# EAGLE board RAM (EAGLE 9.6.2)
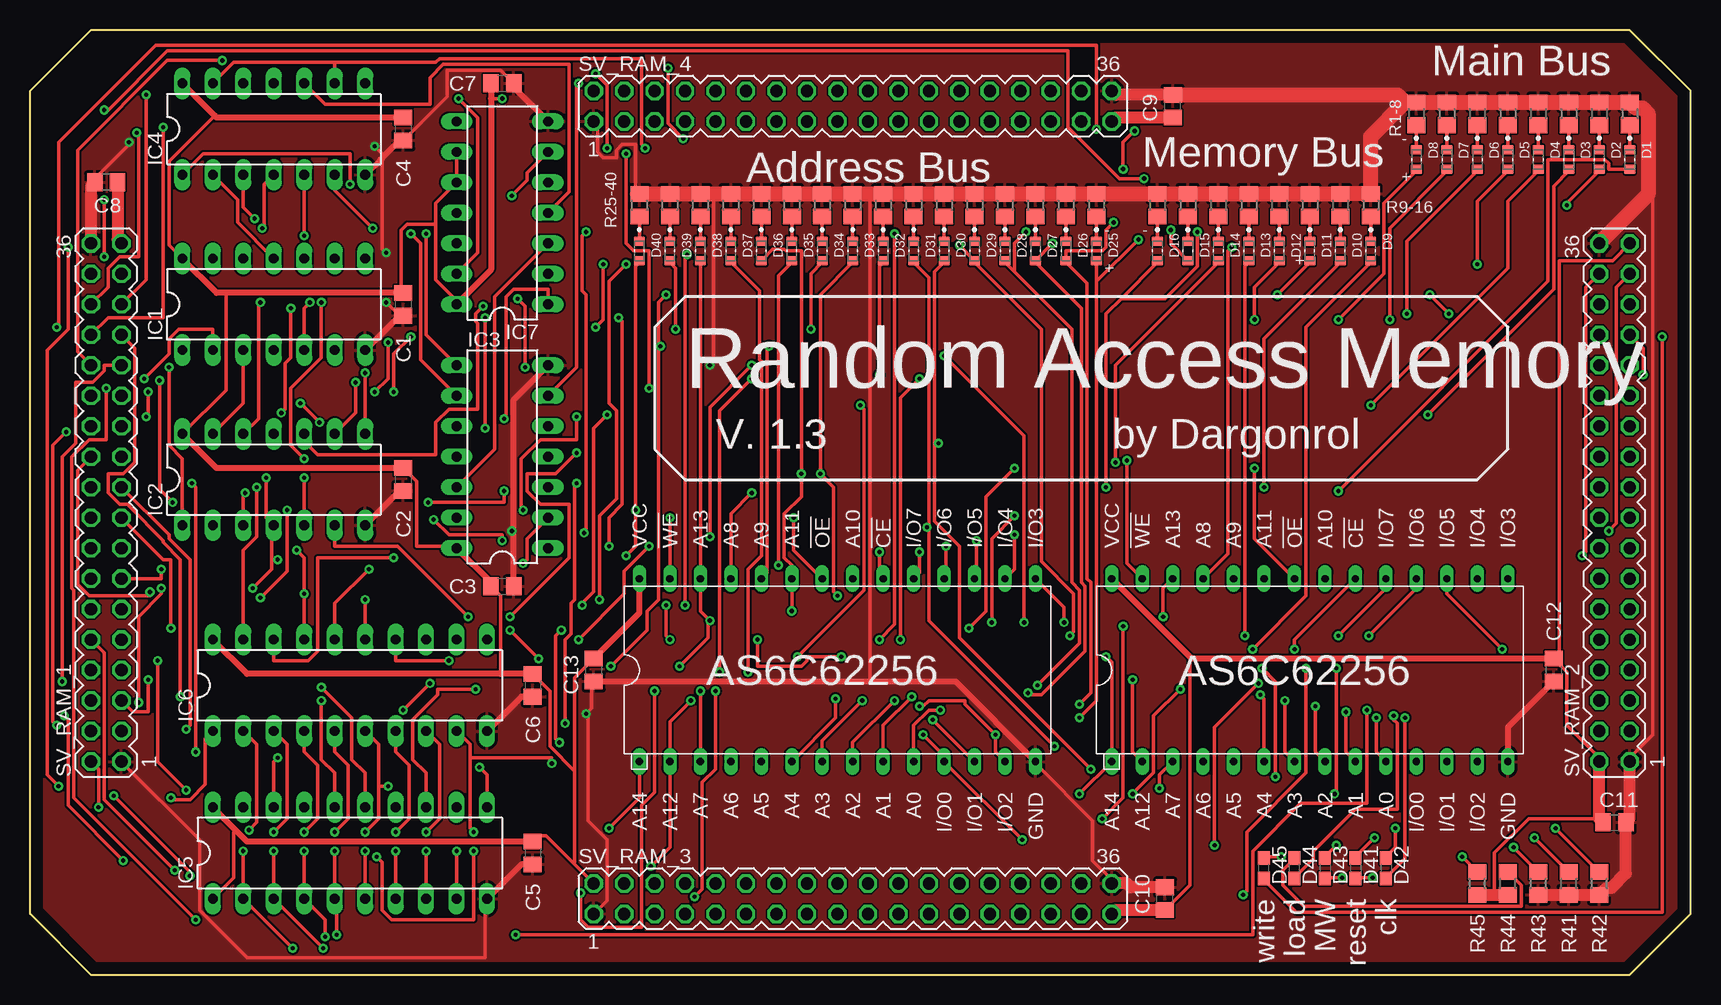
[diagram p0: board, top side]
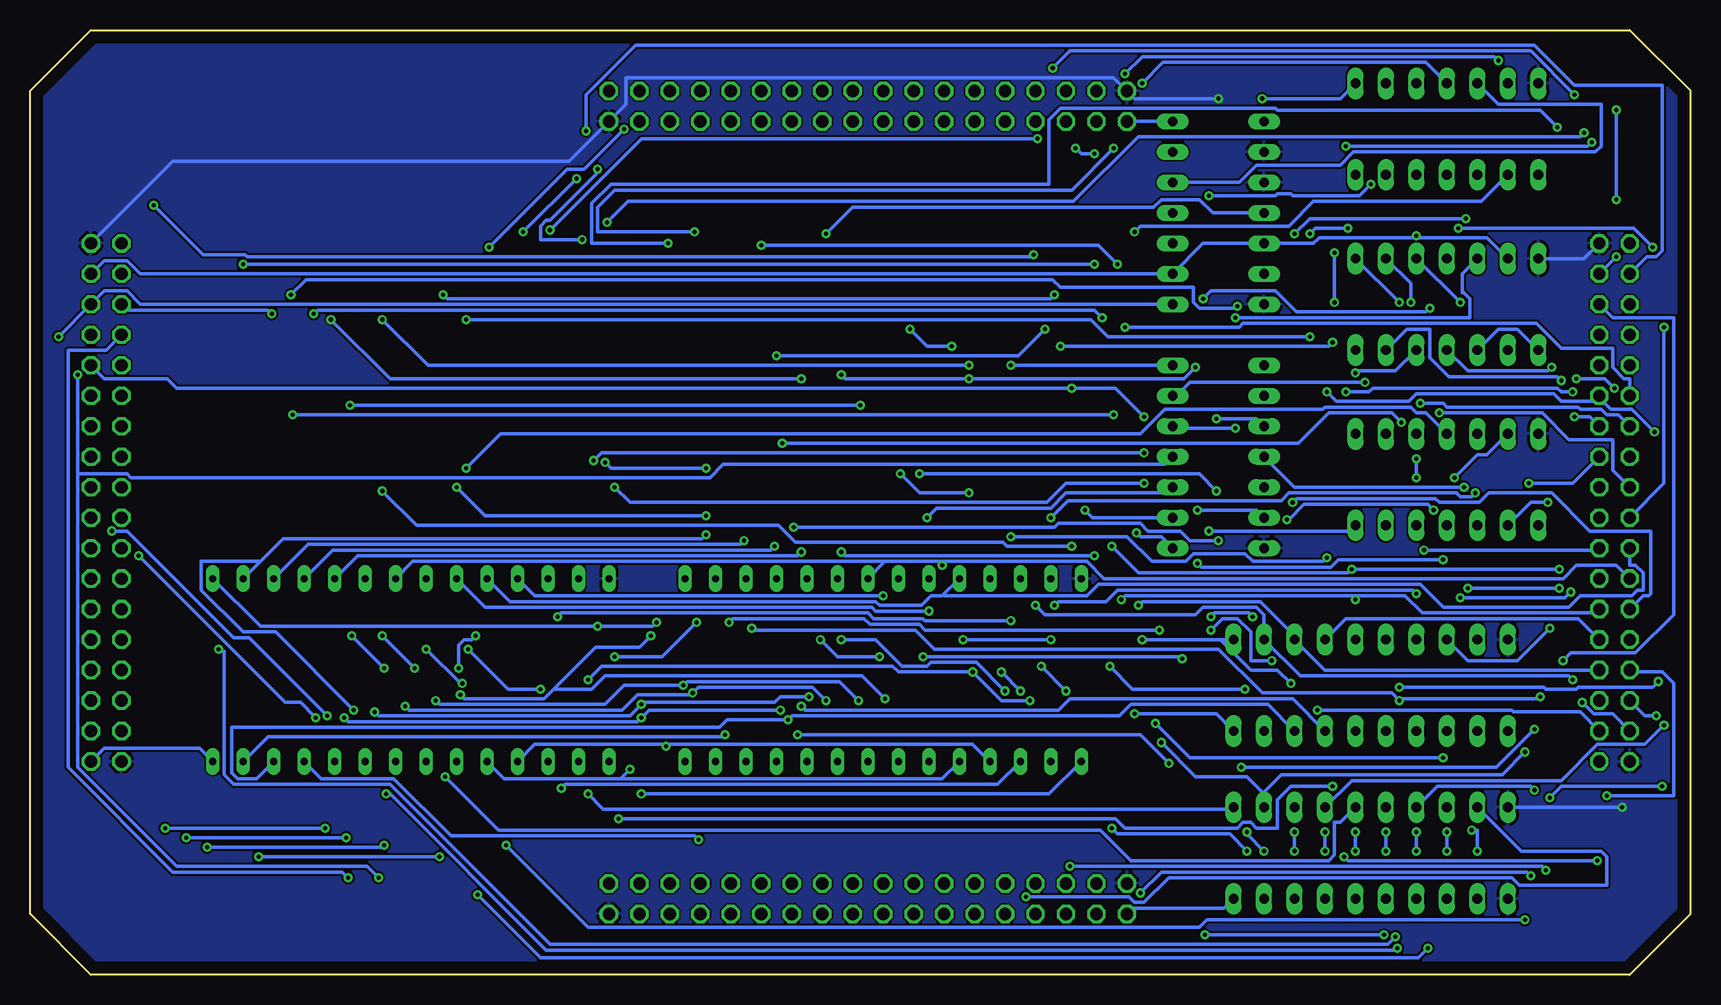
[diagram p1: board, bottom side, seen from below]

Size 138.43 x 78.74 mm. Coordinates in mm from the lower left corner, seen from the top.
Outline: 133.35,0 138.43,5.08 138.43,73.66 133.35,78.74 5.08,78.74 0,73.66 0,5.08 5.08,0 133.35,0
Copper layers (1*16): Top 0.035mm / dielectric 1.5mm / Bottom 0.035mm
Design rules "default *": minimum track width 12mil, minimum drill 0.35mm, track to track 6mil, track to pad 6mil, pad to pad 6mil, via to via 6mil, smd to smd 6mil, copper to edge 40mil, drill to drill 6mil, minimum pad ring 10mil, minimum via ring 8mil, stop-mask expansion 4mil, vias tented up to drill 0mil, thermal gap 10mil

## Footprints (pad centres in the part's own frame; a part is rotated, then mirrored left to right if it is on the bottom)
C0805 = smd 1.3 x 1.5: 1 -0.95,0; 2 0.95,0
LEDC1608X45N = smd 0.81 x 0.93: A 0.81,0; C -0.81,0
0603 = smd 1.1 x 1: 1 -0.85,0; 2 0.85,0
DIL14 = drill 0.813 long: 1 -7.62,-3.81; 2 -5.08,-3.81; 3 -2.54,-3.81; 4 0,-3.81; 5 2.54,-3.81; 6 5.08,-3.81; 7 7.62,-3.81; 8 7.62,3.81; 9 5.08,3.81; 10 2.54,3.81; 11 0,3.81; 12 -2.54,3.81; 13 -5.08,3.81; 14 -7.62,3.81
DIL20 = drill 0.813 long: 1 -11.43,-3.81; 2 -8.89,-3.81; 3 -6.35,-3.81; 4 -3.81,-3.81; 5 -1.27,-3.81; 6 1.27,-3.81; 7 3.81,-3.81; 8 6.35,-3.81; 9 8.89,-3.81; 10 11.43,-3.81; 11 11.43,3.81; 12 8.89,3.81; 13 6.35,3.81; 14 3.81,3.81; 15 1.27,3.81; 16 -1.27,3.81; 17 -3.81,3.81; 18 -6.35,3.81; 19 -8.89,3.81; 20 -11.43,3.81
R0805 = smd 1.3 x 1.5: 1 -0.95,0; 2 0.95,0
MA18-2 = drill 1.016 octagon: 1 -21.59,-1.27; 2 -21.59,1.27; 3 -19.05,-1.27; 4 -19.05,1.27; 5 -16.51,-1.27; 6 -16.51,1.27; 7 -13.97,-1.27; 8 -13.97,1.27; 9 -11.43,-1.27; 10 -11.43,1.27; 11 -8.89,-1.27; 12 -8.89,1.27; 13 -6.35,-1.27; 14 -6.35,1.27; 15 -3.81,-1.27; 16 -3.81,1.27; 17 -1.27,-1.27; 18 -1.27,1.27; 19 1.27,-1.27; 20 1.27,1.27; 21 3.81,-1.27; 22 3.81,1.27; 23 6.35,-1.27; 24 6.35,1.27; 25 8.89,-1.27; 26 8.89,1.27; 27 11.43,-1.27; 28 11.43,1.27; 29 13.97,-1.27; 30 13.97,1.27; 31 16.51,-1.27; 32 16.51,1.27; 33 19.05,-1.27; 34 19.05,1.27; 35 21.59,-1.27; 36 21.59,1.27
AS6C62256 = drill 0.6 long: !CE 7.62,-3.81; !OE 7.62,1.27; !WE 7.62,13.97; A0 -7.62,-6.35; A1 -7.62,-3.81; A2 -7.62,-1.27; A3 -7.62,1.27; A4 -7.62,3.81; A5 -7.62,6.35; A6 -7.62,8.89; A7 -7.62,11.43; A8 7.62,8.89; A9 7.62,6.35; A10 7.62,-1.27; A11 7.62,3.81; A12 -7.62,13.97; A13 7.62,11.43; A14 -7.62,16.51; GND -7.62,-16.51; I/O0 -7.62,-8.89; I/O1 -7.62,-11.43; I/O2 -7.62,-13.97; I/O3 7.62,-16.51; I/O4 7.62,-13.97; I/O5 7.62,-11.43; I/O6 7.62,-8.89; I/O7 7.62,-6.35; VCC 7.62,16.51

## Placement (x,y rotation side)
C1  [C0805]  31.11,55.88 270 top
C2  [C0805]  31.11,41.27 270 top
C3  [C0805]  39.37,32.38 0 top
C4  [C0805]  31.11,70.48 270 top
C5  [C0805]  41.91,10.16 270 top
C6  [C0805]  41.91,24.13 270 top
C7  [C0805]  39.37,74.3 0 top
C8  [C0805]  6.35,66.04 180 top
C9  [C0805]  95.25,72.39 90 top
C10  [C0805]  94.61,6.35 90 top
C11  [C0805]  132.08,12.7 0 top
C12  [C0805]  127,25.4 270 top
C13  [C0805]  46.99,25.4 270 top
D1  LTST-C193KRKT-5A  [LEDC1608X45N]  133.35,67.94 270 top
D2  LTST-C193KRKT-5A  [LEDC1608X45N]  130.81,67.94 270 top
D3  LTST-C193KRKT-5A  [LEDC1608X45N]  128.27,67.94 270 top
D4  LTST-C193KRKT-5A  [LEDC1608X45N]  125.73,67.94 270 top
D5  LTST-C193KRKT-5A  [LEDC1608X45N]  123.19,67.94 270 top
D6  LTST-C193KRKT-5A  [LEDC1608X45N]  120.65,67.94 270 top
D7  LTST-C193KRKT-5A  [LEDC1608X45N]  118.11,67.94 270 top
D8  LTST-C193KRKT-5A  [LEDC1608X45N]  115.57,67.94 270 top
D9  LTST-C193KRKT-5A  [LEDC1608X45N]  111.76,60.33 270 top
D10  LTST-C193KRKT-5A  [LEDC1608X45N]  109.22,60.33 270 top
D11  LTST-C193KRKT-5A  [LEDC1608X45N]  106.68,60.33 270 top
D12  LTST-C193KRKT-5A  [LEDC1608X45N]  104.14,60.33 270 top
D13  LTST-C193KRKT-5A  [LEDC1608X45N]  101.6,60.33 270 top
D14  LTST-C193KRKT-5A  [LEDC1608X45N]  99.06,60.33 270 top
D15  LTST-C193KRKT-5A  [LEDC1608X45N]  96.52,60.33 270 top
D16  LTST-C193KRKT-5A  [LEDC1608X45N]  93.98,60.33 270 top
D25  LTST-C193KRKT-5A  [LEDC1608X45N]  88.9,60.33 270 top
D26  LTST-C193KRKT-5A  [LEDC1608X45N]  86.36,60.33 270 top
D27  LTST-C193KRKT-5A  [LEDC1608X45N]  83.82,60.33 270 top
D28  LTST-C193KRKT-5A  [LEDC1608X45N]  81.28,60.33 270 top
D29  LTST-C193KRKT-5A  [LEDC1608X45N]  78.74,60.33 270 top
D30  LTST-C193KRKT-5A  [LEDC1608X45N]  76.2,60.33 270 top
D31  LTST-C193KRKT-5A  [LEDC1608X45N]  73.66,60.33 270 top
D32  LTST-C193KRKT-5A  [LEDC1608X45N]  71.12,60.33 270 top
D33  LTST-C193KRKT-5A  [LEDC1608X45N]  68.58,60.33 270 top
D34  LTST-C193KRKT-5A  [LEDC1608X45N]  66.04,60.33 270 top
D35  LTST-C193KRKT-5A  [LEDC1608X45N]  63.5,60.33 270 top
D36  LTST-C193KRKT-5A  [LEDC1608X45N]  60.96,60.33 270 top
D37  LTST-C193KRKT-5A  [LEDC1608X45N]  58.42,60.33 270 top
D38  LTST-C193KRKT-5A  [LEDC1608X45N]  55.88,60.33 270 top
D39  LTST-C193KRKT-5A  [LEDC1608X45N]  53.34,60.33 270 top
D40  LTST-C193KRKT-5A  [LEDC1608X45N]  50.8,60.33 270 top
D41  LTST-C193TBKT-5A  [0603]  110.49,8.89 270 top
D42  LTST-C193TBKT-5A  [0603]  113.03,8.89 270 top
D43  LTST-C193TBKT-5A  [0603]  107.95,8.89 270 top
D44  LTST-C193TBKT-5A  [0603]  105.41,8.89 90 top
D45  LTST-C193TBKT-5A  [0603]  102.87,8.89 90 top
IC1  74HCT04N  [DIL14]  20.32,55.88 0 top
IC2  74HCT00N  [DIL14]  20.32,41.27 0 top
IC3  74HCT32N  [DIL14]  39.37,43.18 90 top
IC4  74HCT04N  [DIL14]  20.32,70.48 0 top
IC5  74HCT245N  [DIL20]  26.67,10.16 0 top
IC6  74HCT245N  [DIL20]  26.67,24.13 0 top
IC7  74HCT08N  [DIL14]  39.37,63.5 90 top
R1  [R0805]  133.35,71.75 270 top
R2  [R0805]  130.81,71.75 270 top
R3  [R0805]  128.27,71.75 270 top
R4  [R0805]  125.73,71.75 270 top
R5  [R0805]  123.19,71.75 270 top
R6  [R0805]  120.65,71.75 270 top
R7  [R0805]  118.11,71.75 270 top
R8  [R0805]  115.57,71.75 270 top
R9  [R0805]  111.76,64.14 270 top
R10  [R0805]  109.22,64.14 270 top
R11  [R0805]  106.68,64.14 270 top
R12  [R0805]  104.14,64.14 270 top
R13  [R0805]  101.6,64.14 270 top
R14  [R0805]  99.06,64.14 270 top
R15  [R0805]  96.52,64.14 270 top
R16  [R0805]  93.98,64.14 270 top
R25  [R0805]  88.9,64.14 270 top
R26  [R0805]  86.36,64.14 270 top
R27  [R0805]  83.82,64.14 270 top
R28  [R0805]  81.28,64.14 270 top
R29  [R0805]  78.74,64.14 270 top
R30  [R0805]  76.2,64.14 270 top
R31  [R0805]  73.66,64.14 270 top
R32  [R0805]  71.12,64.14 270 top
R33  [R0805]  68.58,64.14 270 top
R34  [R0805]  66.04,64.14 270 top
R35  [R0805]  63.5,64.14 270 top
R36  [R0805]  60.96,64.14 270 top
R37  [R0805]  58.42,64.14 270 top
R38  [R0805]  55.88,64.14 270 top
R39  [R0805]  53.34,64.14 270 top
R40  [R0805]  50.8,64.14 270 top
R41  [R0805]  128.27,7.62 90 top
R42  [R0805]  130.81,7.62 90 top
R43  [R0805]  125.73,7.62 90 top
R44  [R0805]  123.19,7.62 90 top
R45  [R0805]  120.65,7.62 90 top
SV_RAM_1  [MA18-2]  6.35,39.37 90 top
SV_RAM_2  [MA18-2]  132.08,39.37 90 top
SV_RAM_3  [MA18-2]  68.58,6.35 0 top
SV_RAM_4  [MA18-2]  68.58,72.39 0 top
U$1  AS6C62256  [AS6C62256]  67.31,25.4 90 top
U$2  AS6C62256  [AS6C62256]  106.68,25.4 90 top

## Library data of the parts
C1-C13 = rcl; SPICEPREFIX: C
D1-D16 D25-D40 = Dargon's_lib; MANUFACTURER: Lite-On; MAXIMUM_PACKAGE_HEIGHT: 0.45 mm; PARTREV: C; STANDARD: IPC 7351B
D41-D45 U$1 U$2 = Dargon's_lib
IC1-IC7 = 74xx-eu
R1-R16 R25-R45 = rcl; SPICEPREFIX: R
SV_RAM_1-SV_RAM_4 = con-lstb; OC_FARNELL: unknown; OC_NEWARK: unknown

## Nets
!CTRL_RAM_ASSERT_MAIN: D45.1 IC3.10 IC7.1 SV_RAM_2.31
!CTRL_RAM_LOAD_MAIN: D44.1 IC1.13 IC4.5 IC7.2 IC7.12 SV_RAM_2.33
BUS_!CLK: IC2.10 SV_RAM_2.32
BUS_!RESET: SV_RAM_2.28
BUS_ADDRESS_BUS_0: D25.A SV_RAM_1.34 U$1.A0 U$2.A0
BUS_ADDRESS_BUS_1: D26.A SV_RAM_1.32 U$1.A1 U$2.A1
BUS_ADDRESS_BUS_2: D27.A SV_RAM_1.30 U$1.A2 U$2.A2
BUS_ADDRESS_BUS_3: D28.A SV_RAM_1.28 U$1.A3 U$2.A3
BUS_ADDRESS_BUS_4: D29.A SV_RAM_1.26 U$1.A4 U$2.A4
BUS_ADDRESS_BUS_5: D30.A SV_RAM_1.24 U$1.A5 U$2.A5
BUS_ADDRESS_BUS_6: D31.A SV_RAM_1.22 U$1.A6 U$2.A6
BUS_ADDRESS_BUS_7: D32.A SV_RAM_1.20 U$1.A7 U$2.A7
BUS_ADDRESS_BUS_8: D33.A SV_RAM_1.18 U$1.A8 U$2.A8
BUS_ADDRESS_BUS_9: D34.A SV_RAM_1.16 U$1.A9 U$2.A9
BUS_ADDRESS_BUS_10: D35.A SV_RAM_1.14 U$1.A10 U$2.A10
BUS_ADDRESS_BUS_11: D36.A SV_RAM_1.12 U$1.A11 U$2.A11
BUS_ADDRESS_BUS_12: D37.A SV_RAM_1.10 U$1.A12 U$2.A12
BUS_ADDRESS_BUS_13: D38.A SV_RAM_1.8 U$1.A13 U$2.A13
BUS_ADDRESS_BUS_14: D39.A SV_RAM_1.6 U$1.A14 U$2.A14
BUS_ADDRESS_BUS_15: D40.A IC1.1 IC1.3 IC2.4 IC2.13 IC3.2 SV_RAM_1.4 U$1.!CE
BUS_CLK: D42.2 SV_RAM_2.34
BUS_MAIN_BUS_0: D1.A IC6.11 SV_RAM_1.3
BUS_MAIN_BUS_1: D2.A IC6.12 SV_RAM_1.5
BUS_MAIN_BUS_2: D3.A IC6.13 SV_RAM_1.7
BUS_MAIN_BUS_3: D4.A IC6.14 SV_RAM_1.9
BUS_MAIN_BUS_4: D5.A IC6.15 SV_RAM_1.11
BUS_MAIN_BUS_5: D6.A IC6.16 SV_RAM_1.13
BUS_MAIN_BUS_6: D7.A IC6.17 SV_RAM_1.15
BUS_MAIN_BUS_7: D8.A IC6.18 SV_RAM_1.17
BUS_MEMORY_BUS_0: D9.A IC5.11 SV_RAM_1.19
BUS_MEMORY_BUS_1: D10.A IC5.12 SV_RAM_1.21
BUS_MEMORY_BUS_2: D11.A IC5.13 SV_RAM_1.23
BUS_MEMORY_BUS_3: D12.A IC5.14 SV_RAM_1.25
BUS_MEMORY_BUS_4: D13.A IC5.15 SV_RAM_1.27
BUS_MEMORY_BUS_5: D14.A IC5.16 SV_RAM_1.29
BUS_MEMORY_BUS_6: D15.A IC5.17 SV_RAM_1.31
BUS_MEMORY_BUS_7: D16.A IC5.18 SV_RAM_1.33
BUS_RESET: D41.2 SV_RAM_2.30
CTRL_MANUAL_WRITE: D43.2 IC3.4 SV_RAM_2.29
CTRL_MANUAL_WRITE_ENABLE: IC3.13 IC4.9 IC4.13 SV_RAM_2.27
GND: C1.2 C2.2 C3.2 C4.2 C5.2 C6.2 C7.2 C8.2 C9.2 C10.2 C11.2 C12.2 C13.2 IC1.7 IC2.7 IC3.7 IC4.7 IC5.10 IC6.10 IC7.7 R1.1 R2.1 R3.1 R4.1 R5.1 R6.1 R7.1 R8.1 R9.1 R10.1 R11.1 R12.1 R13.1 R14.1 R15.1 R16.1 R25.1 R26.1 R27.1 R28.1 R29.1 R30.1 R31.1 R32.1 R33.1 R34.1 R35.1 R36.1 R37.1 R38.1 R39.1 R40.1 R41.1 R42.1 R43.1 SV_RAM_1.1 SV_RAM_1.36 SV_RAM_2.1 SV_RAM_2.36 SV_RAM_3.1 SV_RAM_3.36 SV_RAM_4.1 SV_RAM_4.36 U$1.GND U$2.GND
N$1: IC5.2 IC6.2 U$1.I/O7 U$2.I/O7
N$2: IC5.3 IC6.3 U$1.I/O6 U$2.I/O6
N$3: IC5.4 IC6.4 U$1.I/O5 U$2.I/O5
N$4: IC5.5 IC6.5 U$1.I/O4 U$2.I/O4
N$5: IC5.6 IC6.6 U$1.I/O3 U$2.I/O3
N$6: IC5.7 IC6.7 U$1.I/O2 U$2.I/O2
N$7: IC5.8 IC6.8 U$1.I/O1 U$2.I/O1
N$8: IC5.9 IC6.9 U$1.I/O0 U$2.I/O0
N$9: IC3.8 IC4.3
N$10: IC3.9 IC4.6
N$11: D1.C R1.2
N$12: D2.C R2.2
N$13: IC4.4 IC6.1
N$14: IC3.11 IC6.19
N$15: IC1.10 IC2.12
N$16: IC1.4 IC2.1
N$17: IC1.2 U$2.!CE
N$18: IC1.6 IC2.2
N$20: IC2.3 U$1.!WE
N$21: IC2.6 U$2.!WE
N$22: IC1.8 IC2.5
N$23: D3.C R3.2
N$24: IC1.5 IC1.9 IC2.8
N$25: IC1.11 IC3.1 IC4.2
N$26: IC2.11 U$2.!OE
N$27: D4.C R4.2
N$28: IC3.3 U$1.!OE
N$29: IC1.12 IC3.5
N$30: D5.C R5.2
N$31: D6.C R6.2
N$32: D7.C R7.2
N$33: D8.C R8.2
N$34: D9.C R9.2
N$35: D10.C R10.2
N$36: D11.C R11.2
N$37: D12.C R12.2
N$38: D13.C R13.2
N$39: D14.C R14.2
N$40: D15.C R15.2
N$41: D16.C R16.2
N$42: IC3.12 IC7.3
N$43: IC4.8 IC7.13
N$44: IC2.9 IC3.6 IC4.11
N$45: IC5.19 IC7.11
N$46: IC4.1 IC7.6
N$47: IC4.10 IC7.4
N$48: IC4.12 IC7.5
N$50: D25.C R25.2
N$51: D26.C R26.2
N$52: D27.C R27.2
N$53: D28.C R28.2
N$54: D29.C R29.2
N$55: D30.C R30.2
N$56: D31.C R31.2
N$57: D32.C R32.2
N$58: D33.C R33.2
N$59: D34.C R34.2
N$60: D35.C R35.2
N$61: D36.C R36.2
N$62: D37.C R37.2
N$63: D38.C R38.2
N$64: D39.C R39.2
N$65: D40.C R40.2
N$66: D41.1 R41.2
N$67: D42.1 R42.2
N$68: D43.1 R43.2
N$69: D44.2 R44.2
N$70: D45.2 R45.2
VCC: C1.1 C2.1 C3.1 C4.1 C5.1 C6.1 C7.1 C8.1 C9.1 C10.1 C11.1 C12.1 C13.1 IC1.14 IC2.14 IC3.14 IC4.14 IC5.1 IC5.20 IC6.20 IC7.9 IC7.10 IC7.14 R44.1 R45.1 SV_RAM_1.2 SV_RAM_1.35 SV_RAM_2.2 SV_RAM_2.35 SV_RAM_3.2 SV_RAM_3.35 SV_RAM_4.2 SV_RAM_4.35 U$1.VCC U$2.VCC

## Tracks (layer width: path | path; a pad name or v marks a point on that pad's centre or on a via)
!CTRL_RAM_ASSERT_MAIN  (via drill 0.35)
  Top 0.305: v39.53,46.35 39.69,46.51 39.69,56.52 40.32,57.15 43.18,57.15 IC7.1 | v136.05,53.18 136.05,5.24 105.57,5.24 102.87,7.94 D45.1
  Bottom 0.305: IC3.10 36.2,46.35 v39.53,46.35 | v136.05,53.18 SV_RAM_2.31 132.24,56.99 130.33,56.99 129.22,55.88 IC7.1
!CTRL_RAM_LOAD_MAIN  (via drill 0.35)
  Top 0.305: v22.86,61.59 IC4.5 | v113.67,21.59 113.67,21.27 113.98,20.95 113.98,13.81 110.49,13.81 107,10.32 107,9.68 105.41,8.1 D44.1 | v131.6,36.99 132.24,37.62 132.24,57.31 SV_RAM_2.33
  Bottom 0.305: IC1.13 16.99,61.44 22.86,61.44 | 22.86,61.44 30.96,61.44 31.43,60.96 IC7.12 40.64,60.96 IC7.2 129.22,58.42 130.33,59.53 132.24,59.53 SV_RAM_2.33 | 22.86,61.44 v22.86,61.59 | v113.67,21.59 120.17,28.1 121.44,28.1 130.33,36.99 v131.6,36.99
BUS_!CLK  (via drill 0.35)
  Top 0.305: IC2.10 23.34,44.61 23.34,43.97 23.97,43.34 33.81,43.34 33.81,46.04 34.92,47.15 37.31,47.15 37.31,54.29 37.15,54.45 37.15,55.09 v37.78,55.72 | v118.27,55.09 v116.68,56.67
  Bottom 0.305: v37.78,55.72 37.94,55.56 40.96,55.56 41.43,56.04 41.43,57.31 52.55,57.31 53.18,57.94 115.41,57.94 v116.68,56.67 | v118.27,55.09 118.59,55.4 130.33,55.4 SV_RAM_2.32
BUS_ADDRESS_BUS_0  (via drill 0.35)
  Top 0.305: 88.9,57.78 88.9,22.86 v87.47,21.43 | 88.9,57.78 D25.A | v75.88,22.07 74.93,22.07 73.66,20.8 U$1.A0 | U$2.A0 112.24,18.57 v112.24,21.43 | v92.08,70.33 91.12,69.37 v91.12,67.15 | 88.9,57.78 v92.39,61.28
  Bottom 0.305: v75.88,22.07 86.84,22.07 v87.47,21.43 87.79,21.11 111.92,21.11 v112.24,21.43 | SV_RAM_1.34 3.65,59.85 2.86,59.85 2.38,60.33 2.38,74.14 9.68,74.14 13.02,77.47 87.95,77.47 92.08,73.34 v92.08,70.33 | v91.12,67.15 91.12,66.83 95.09,62.87 95.41,62.87 95.89,62.39 95.89,61.28 v92.39,61.28
BUS_ADDRESS_BUS_1  (via drill 0.35)
  Top 0.305: v87.47,22.54 88.42,23.5 88.42,32.7 88.11,33.02 88.11,57.63 86.36,59.37 D26.A 86.36,60.33 89.38,60.33 89.69,60.64 89.69,62.07 v90.33,62.71 | v73.5,23.18 71.12,20.8 U$1.A1 | U$2.A1 109.7,18.57 v109.7,21.91 | SV_RAM_1.32 6.51,57.31 6.51,58.9 7.46,59.85 9.05,59.85 9.05,70.01 v8.89,70.17
  Bottom 0.305: v73.5,23.18 75.88,23.18 76.36,22.7 87.31,22.7 v87.47,22.54 88.42,21.59 109.38,21.59 v109.7,21.91 | v8.89,70.17 9.21,69.85 46.04,69.85 51.44,64.45 88.58,64.45 v90.33,62.71
BUS_ADDRESS_BUS_2  (via drill 0.35)
  Top 0.305: v83.19,23.5 83.19,23.34 84.3,23.34 87.95,26.99 87.95,32.38 87.63,32.7 87.63,55.56 83.82,59.37 D27.A v85.25,60.96 | v72.07,22.86 68.58,19.37 U$1.A2 | U$2.A2 107.16,18.57 v107.16,22.38 | SV_RAM_1.30 6.51,54.77 11.11,54.77 v11.11,70.64
  Bottom 0.305: v72.07,22.86 73.18,23.97 82.71,23.97 v83.19,23.5 83.34,23.34 87.79,23.34 89.06,22.07 106.84,22.07 v107.16,22.38 | v11.11,70.64 12.54,72.07 34.45,72.07 34.61,72.23 52.55,72.23 53.5,71.28 53.5,65.88 90.01,65.88 91.6,64.29 91.6,60.96 v85.25,60.96
BUS_ADDRESS_BUS_3  (via drill 0.35)
  Top 0.305: 81.99,58.66 86.84,53.82 86.84,32.7 87.47,32.07 87.47,27.62 v83.98,24.13 | 81.99,58.66 81.28,59.37 D28.A | v69.37,22.86 66.04,19.53 U$1.A3 | U$2.A3 104.62,18.57 v104.62,22.86 | SV_RAM_1.28 3.97,51.91 3.97,68.74 11.43,76.2 v16.03,76.2 | v47.15,75.09 48.1,74.14 v48.1,68.9 | v83.03,61.91 82.07,60.96 82.07,58.74 81.99,58.66
  Bottom 0.305: v69.37,22.86 70.96,24.45 83.66,24.45 v83.98,24.13 88.9,24.13 90.49,22.54 104.3,22.54 v104.62,22.86 | v16.03,76.2 16.35,76.52 45.72,76.52 v47.15,75.09 | v48.1,68.9 51.59,65.41 89.69,65.41 91.12,63.98 91.12,61.91 v83.03,61.91
BUS_ADDRESS_BUS_4  (via drill 0.35)
  Top 0.305: v86.68,28.26 87,28.57 87,31.75 84.3,34.45 84.3,53.82 78.74,59.37 D29.A v77.47,60.8 | v102.55,23.34 102.87,23.02 U$2.A4 | U$1.A4 67.15,21.43 v67.15,23.02 | v47.15,53.98 47.78,54.61 v47.78,59.21
  Bottom 0.305: v86.68,28.26 87.63,27.3 91.28,27.3 94.69,23.89 | 94.69,23.89 95.57,23.02 102.23,23.02 v102.55,23.34 | v67.15,23.02 69.06,24.92 90.49,24.92 91.6,23.81 94.61,23.81 94.69,23.89 | SV_RAM_1.26 5.08,49.69 5.56,49.69 6.51,50.64 6.51,52.23 10.79,52.23 12.86,54.29 37.31,54.29 37.62,53.98 v47.15,53.98 | v47.78,59.21 49.37,60.8 v77.47,60.8
BUS_ADDRESS_BUS_5  (via drill 0.35)
  Top 0.305: 75.41,44.29 75.41,37.78 77.47,35.72 77.47,28.1 v88.42,17.14 | 75.41,44.29 75.41,58.58 76.2,59.37 D30.A | v24.13,46.04 v22.54,47.62 | 75.41,44.29 v75.72,44.29
  Bottom 0.305: 89.14,16.43 89.22,16.35 98.9,16.35 U$2.A5 | 89.14,16.43 v88.42,17.14 | U$1.A5 62.39,16.35 89.06,16.35 89.14,16.43 | SV_RAM_1.24 6.03,46.67 6.99,46.67 7.46,47.15 9.21,47.15 9.37,47.31 20.32,47.31 20.64,47.62 v22.54,47.62 | v24.13,46.04 24.92,46.83 30.16,46.83 32.7,44.29 v75.72,44.29
BUS_ADDRESS_BUS_6  (via drill 0.35)
  Top 0.305: 74.93,37.31 74.93,29.53 v85.41,19.05 | 74.93,37.31 74.93,58.1 73.66,59.37 D31.A | SV_RAM_1.22 3.97,42.07 3.97,32.54 4.92,31.59 10,31.59 v10,31.91 | v19.21,31.43 21.43,33.66 v21.43,38.73 | v33.66,37.94 34.92,36.67 39.37,36.67 v39.37,36.2 | 74.93,37.31 v74.77,37.31
  Bottom 0.305: U$2.A6 96.36,19.21 85.57,19.21 v85.41,19.05 85.41,19.21 59.85,19.21 U$1.A6 | v10,31.91 10.48,31.43 v19.21,31.43 | v21.43,38.73 21.91,39.21 32.23,39.21 33.5,37.94 v33.66,37.94 | v39.37,36.2 41.75,36.2 42.55,36.99 45.24,36.99 45.88,37.62 52.7,37.62 53.02,37.31 v74.77,37.31
BUS_ADDRESS_BUS_7  (via drill 0.35)
  Top 0.305: v70.8,50.01 70.8,59.05 71.12,59.37 D32.A | v60.17,49.69 57.47,46.99 v57.47,25.24 | U$1.A7 v55.88,23.65 | U$2.A7 94.14,16.67 v94.14,15.56 | v20.95,46.83 21.27,47.15 21.27,50.96 21.75,51.44 v21.75,55.56 | v40.64,56.36 41.27,55.72 v41.27,50.64
  Bottom 0.305: v70.8,50.01 70.48,49.69 v60.17,49.69 42.23,49.69 v41.27,50.64 | v55.88,23.65 v57.47,25.24 | v94.14,15.56 93.82,15.88 57.78,15.88 U$1.A7 | SV_RAM_1.20 6.51,42.07 6.51,44.61 10.16,44.61 12.38,46.83 v20.95,46.83 | v21.75,55.56 22.07,55.24 32.86,55.24 34.61,56.99 40.01,56.99 v40.64,56.36
BUS_ADDRESS_BUS_8  (via drill 0.35)
  Top 0.305: v60.17,40.16 58.42,38.42 U$1.A8 | D33.A 68.58,59.37 65.88,56.67 v65.88,41.75 66.99,40.64 66.99,31.91 v67.31,31.59 | v2.22,53.98 2.38,54.13 2.38,69.37 10.48,77.47 88.9,77.47 v88.9,70.48 | v100.17,60.64 99.85,60.33 99.85,35.08 U$2.A8
  Bottom 0.305: v65.88,41.75 64.29,40.16 v60.17,40.16 | U$2.A8 96.36,31.59 v67.31,31.59 | SV_RAM_1.18 2.22,40.96 v2.22,53.98 | v88.9,70.48 92.23,67.15 93.66,67.15 v100.17,60.64
BUS_ADDRESS_BUS_9  (via drill 0.35)
  Top 0.305: v65.09,53.82 65.09,58.42 66.04,59.37 D34.A | v61.59,52.39 61.44,52.23 61.44,33.5 U$1.A9
  Bottom 0.305: v65.09,53.82 63.66,52.39 v61.59,52.39 | U$2.A9 98.42,31.11 67.94,31.11 67.63,30.8 64.14,30.8 63.34,31.59 62.39,31.59 62.31,31.67 | U$1.A9 62.31,31.67 | SV_RAM_1.16 5.08,34.13 4.6,34.13 3.97,33.5 3.97,32.07 4.45,32.07 4.92,31.59 9.21,31.59 10.16,30.64 20.64,30.64 22.54,32.54 49.37,32.54 50.32,31.59 62.23,31.59 62.31,31.67
BUS_ADDRESS_BUS_10  (via drill 0.35)
  Top 0.305: v62.39,34.13 62.39,58.26 63.5,59.37 D35.A
  Bottom 0.305: U$1.A10 67.23,34.37 | 67.23,34.37 67.15,34.45 62.71,34.45 v62.39,34.13 62.55,34.45 50.32,34.45 48.9,33.02 10.64,33.02 9.53,34.13 6.19,34.13 SV_RAM_1.14 | U$2.A10 106.52,34.45 67.31,34.45 67.23,34.37
BUS_ADDRESS_BUS_11  (via drill 0.35)
  Top 0.305: D36.A 61.91,60.48 62.87,60.48 63.02,60.33 64.29,60.33 v64.29,41.75 64.29,39.85 62.87,38.42 62.87,34.77 63.5,34.13 U$1.A11 v63.5,30.32 | v33.18,39.37 39.53,39.37 v39.53,40.32
  Bottom 0.305: U$2.A11 100.49,30.64 68.26,30.64 67.94,30.32 v63.5,30.32 | SV_RAM_1.12 3.97,31.59 3.49,31.59 3.33,31.75 3.33,36.99 8.41,36.99 11.59,40.16 16.83,40.16 17.62,39.37 20.95,39.37 21.27,39.69 32.86,39.69 v33.18,39.37 | v39.53,40.32 40.96,41.75 v64.29,41.75
BUS_ADDRESS_BUS_12  (via drill 0.35)
  Top 0.305: v59.85,25.24 59.85,33.81 60.96,34.92 60.96,51.12 60.8,51.28 60.8,56.99 58.42,59.37 D37.A | v55.09,22.86 53.34,21.11 U$1.A12 53.34,10.64 v51.75,9.05 | U$2.A12 91.92,18.57 v91.92,24.61 | SV_RAM_1.10 6.19,26.83 6.19,14.61 v12.06,8.73
  Bottom 0.305: v55.09,22.86 57.47,22.86 v59.85,25.24 66.04,25.24 66.52,25.72 90.81,25.72 v91.92,24.61 | v12.06,8.73 12.38,9.05 v51.75,9.05
BUS_ADDRESS_BUS_13  (via drill 0.35)
  Top 0.305: D38.A U$1.A13 55.88,30.32 v56.67,29.53 56.52,29.53 56.52,28.1 v54.13,25.72 | U$2.A13 94.46,32.23 v94.46,29.84 | v6.99,14.92 13.34,8.57 v13.34,8.26 | v45.88,6.83 45.88,4.6 46.51,3.97 50.96,3.97 50.96,14.13 52.07,15.24 v52.07,23.65
  Bottom 0.305: v94.46,29.84 94.14,30.16 68.58,30.16 68.1,29.69 63.98,29.69 63.82,29.53 v56.67,29.53 | SV_RAM_1.8 4.92,25.24 2.38,25.24 1.43,24.29 1.43,14.92 v6.99,14.92 | v13.34,8.26 13.65,8.57 44.13,8.57 v45.88,6.83 | v54.13,25.72 v52.07,23.65
BUS_ADDRESS_BUS_14  (via drill 0.35)
  Top 0.305: v53.82,53.82 53.82,58.9 53.34,59.37 D39.A | v76.2,51.59 82.87,44.93 v82.87,29.37 | v89.69,26.51 90.17,26.04 U$2.A14 v87.47,15.08 | v2.86,21.59 3.17,21.27 3.17,14.13 v7.78,9.53 | v28.89,9.84 29.37,9.37 29.37,5.4 30.16,4.6 36.99,4.6 v36.99,10.32 | v48.26,12.22 50.8,14.76 U$1.A14
  Bottom 0.305: v53.82,53.82 56.04,51.59 v76.2,51.59 | v82.87,29.37 85.72,26.51 v89.69,26.51 | U$1.A14 53.5,15.08 v87.47,15.08 | SV_RAM_1.6 3.81,21.59 v2.86,21.59 | v7.78,9.53 28.57,9.53 v28.89,9.84 | v36.99,10.32 38.42,11.75 47.78,11.75 v48.26,12.22
BUS_ADDRESS_BUS_15  (via drill 0.35)
  Top 0.305: IC2.13 17.78,47.62 IC1.3 | v19.68,41.43 19.68,38.1 IC2.4 20.16,37.47 20.16,34.61 | v9.05,22.7 9.05,29.84 10.95,31.75 v10.95,32.23 | v18.57,32.23 20.16,33.81 20.16,34.61 | D40.A 50.8,59.37 50.48,59.05 v50.48,38.73 50.48,35.72 v49.69,34.92 | U$1.!CE 70.8,33.34 v70.8,35.24 | v20.64,34.61 20.16,34.61 | v41.12,34.29 41.43,34.61 41.43,36.35 IC3.2
  Bottom 0.305: v19.68,41.43 17.78,43.34 16.99,43.34 IC2.13 | IC1.1 14.45,53.82 16.03,53.82 IC1.3 | SV_RAM_1.4 6.51,21.75 8.1,21.75 v9.05,22.7 | v18.57,32.23 v10.95,32.23 | v50.48,38.73 49.85,38.1 IC3.2 | v70.8,35.24 70.48,34.92 v49.69,34.92 | v20.64,34.61 29.37,34.61 30,33.97 40.8,33.97 v41.12,34.29
BUS_CLK  (via drill 0.35)
  Top 0.305: v114.62,21.43 114.62,9.68 113.03,8.1 D42.2 | v129.38,34.92 129.7,35.24 129.7,57.31 SV_RAM_2.34
  Bottom 0.305: v114.62,21.43 115.89,22.7 117.16,22.7 v129.38,34.92
BUS_MAIN_BUS_0  (via drill 0.35)
  Top 0.305: v109.06,40.32 126.52,57.78 126.52,67.94 131.29,67.94 131.6,67.63 131.6,67.15 133.35,67.15 D1.A | v51.59,35.72 49.53,33.66 49.53,31.75 v45.72,27.94 | v33.34,24.29 v31.11,22.07
  Bottom 0.305: v109.06,40.32 106.2,37.47 76.04,37.47 74.61,36.04 57.31,36.04 56.99,35.72 v51.59,35.72 | IC6.11 39.21,27.94 | 39.21,27.94 v45.72,27.94 | SV_RAM_1.3 9.21,21.91 14.76,21.91 14.92,22.07 v31.11,22.07 | v33.34,24.29 34.45,25.4 36.67,25.4 39.21,27.94
BUS_MAIN_BUS_1  (via drill 0.35)
  Top 0.305: v128.11,64.14 128.11,64.29 130.81,66.99 D2.A | v54.77,60.01 54.61,59.85 v54.61,30.8 | SV_RAM_1.5 8.57,21.91 9.84,21.91 v9.84,24.61
  Bottom 0.305: v128.11,64.14 123.98,60.01 120.49,60.01 120.33,59.85 54.93,59.85 v54.77,60.01 | v54.61,30.8 53.82,30 41.27,30 40.64,30.64 36.2,30.64 35.56,30 IC6.12 32.54,24.92 10.16,24.92 v9.84,24.61
BUS_MAIN_BUS_2  (via drill 0.35)
  Top 0.305: v116.52,46.67 127,57.15 127,65.72 128.27,66.99 D3.A | v48.1,46.67 46.99,45.56 46.99,31.91 46.04,30.96 v46.04,30.8
  Bottom 0.305: v48.1,46.67 v116.52,46.67 | v46.04,30.8 45.72,31.11 35.88,31.11 33.02,28.26 IC6.13 30.48,25.4 SV_RAM_1.7
BUS_MAIN_BUS_3  (via drill 0.35)
  Top 0.305: v111.76,47.47 123.19,58.9 123.19,64.45 125.73,66.99 D4.A | v69.22,47.47 69.53,47.15 69.53,32.07 v63.98,26.51 | v40.01,28.73 v42.39,26.35 | v34.92,26.19 30.48,26.19 IC6.14
  Bottom 0.305: v69.22,47.47 v111.76,47.47 | v63.98,26.51 42.55,26.51 v42.39,26.35 | v40.01,28.73 39.05,29.69 37.78,29.69 36.67,28.57 36.67,26.19 v34.92,26.19 | SV_RAM_1.9 9.37,29.69 28.73,29.69 IC6.14
BUS_MAIN_BUS_4  (via drill 0.35)
  Top 0.305: v120.65,59.21 120.65,64.45 123.19,66.99 D5.A | v49.69,59.21 48.26,57.78 48.26,47.62 48.9,46.99 48.9,39.69 47.47,38.26 v47.47,31.27 | v27.94,31.27 IC6.15
  Bottom 0.305: v49.69,59.21 v120.65,59.21 | v47.47,31.27 47.15,31.59 27.94,31.59 | 27.94,31.59 23.81,31.59 22.38,30.16 7.94,30.16 SV_RAM_1.11 | 27.94,31.59 v27.94,31.27
BUS_MAIN_BUS_5  (via drill 0.35)
  Top 0.305: v114.78,55.09 114.78,61.12 120.65,66.99 D6.A | v49.05,54.77 49.37,54.45 49.37,39.21 48.26,38.1 v48.26,35.72 | v28.26,33.81 25.4,30.96 IC6.16 | SV_RAM_1.13 10.95,33.02 v10.95,33.81
  Bottom 0.305: v114.78,55.09 114.46,55.4 49.69,55.4 v49.05,54.77 | v48.26,35.72 46.04,33.5 28.57,33.5 v28.26,33.81 v10.95,33.81
BUS_MAIN_BUS_6  (via drill 0.35)
  Top 0.305: v113.35,54.61 113.35,62.23 118.11,66.99 D7.A | v74.14,49.69 72.55,48.1 v72.55,27.94 | v67.63,26.51 64.77,26.51 64.77,26.19 64.29,25.72 60.64,25.72 v60.64,27.94 | v53.34,27.94 53.02,28.26 v53.02,30.8 | IC6.17 v22.86,31.75 22.86,34.77 v22.23,35.4
  Bottom 0.305: v113.35,54.61 108.43,49.69 v74.14,49.69 | v72.55,27.94 71.12,26.51 v67.63,26.51 | v53.34,27.94 v60.64,27.94 | v53.02,30.8 52.7,31.11 48.74,31.11 47.78,32.07 23.18,32.07 v22.86,31.75 | SV_RAM_1.15 7.78,35.4 v22.23,35.4
BUS_MAIN_BUS_7  (via drill 0.35)
  Top 0.305: v109.06,54.61 112.87,58.42 112.87,64.29 115.57,66.99 D8.A | v60.17,50.8 56.67,47.31 v56.67,36.51 | v30.32,34.77 23.97,34.77 23.97,26.99 23.18,26.19 20.32,26.19 IC6.18 | SV_RAM_1.17 11.11,34.61 11.75,34.61 v11.75,28.89
  Bottom 0.305: v109.06,54.61 105.25,50.8 v60.17,50.8 | v56.67,36.51 46.99,36.51 44.93,34.45 42.07,34.45 41.43,35.08 37.15,35.08 36.51,34.45 30.64,34.45 v30.32,34.77 | v11.75,28.89 14.45,26.19 18.57,26.19 IC6.18
BUS_MEMORY_BUS_0  (via drill 0.35)
  Top 0.305: v101.92,27.15 106.36,31.59 106.36,53.98 111.76,59.37 D9.A | v95.89,23.81 93.66,21.59 93.66,16.83 v91.92,15.08 | SV_RAM_1.19 11.59,36.67 11.59,36.35 13.34,34.61 13.34,20.8 v13.02,20.48 | v37.47,17.3 38.1,16.67 IC5.11
  Bottom 0.305: v101.92,27.15 98.58,23.81 v95.89,23.81 | v91.92,15.08 90.65,13.81 38.26,13.81 IC5.11 | v13.02,20.48 16.19,17.3 v37.47,17.3
BUS_MEMORY_BUS_1  (via drill 0.35)
  Top 0.305: v102.87,40.64 102.87,53.02 109.22,59.37 D10.A | v82.07,38.26 80.17,36.35 v80.17,29.37 | v44.29,28.73 43.81,28.26 43.81,19.68 v44.13,19.37 | v13.49,40.96 13.81,40.64 v13.81,18.57
  Bottom 0.305: v102.87,40.64 100.49,38.26 v82.07,38.26 | v80.17,29.37 79.85,29.69 68.9,29.69 68.42,29.21 64.29,29.21 63.82,28.73 v44.29,28.73 | v44.13,19.37 41.27,16.51 36.99,16.51 35.56,15.08 IC5.12 35.56,15.24 34.13,16.67 15.72,16.67 v13.81,18.57 | SV_RAM_1.21 9.84,40.96 v13.49,40.96
BUS_MEMORY_BUS_2  (via drill 0.35)
  Top 0.305: v103.98,56.67 106.68,59.37 D11.A | v53.02,56.67 52.39,56.04 52.39,52.39 | 52.39,52.39 52.39,31.27 51.44,30.32 51.44,28.73 v48.42,25.72 | v37.15,23.81 33.97,23.81 33.97,23.34 31.91,21.27 31.91,17.94 33.02,16.83 IC5.13 | v9.68,46.51 9.84,46.67 v9.84,48.58 | v28.73,48.58 29.84,49.69 v29.84,52.7 | 52.39,52.39 v52.55,52.39
  Bottom 0.305: v103.98,56.67 103.66,56.36 53.34,56.36 v53.02,56.67 | v48.42,25.72 46.51,23.81 v37.15,23.81 | SV_RAM_1.23 8.41,46.51 v9.68,46.51 | v9.84,48.58 10.79,48.58 11.11,48.9 26.51,48.9 26.83,48.58 v28.73,48.58 | v29.84,52.7 30.16,52.39 v52.55,52.39
BUS_MEMORY_BUS_3  (via drill 0.35)
  Top 0.305: v102.08,54.61 102.08,57.31 104.14,59.37 D12.A | v31.75,53.18 30.32,51.75 v30.32,48.58 | v2.22,20.8 1.91,21.11 1.91,44.13 v3.02,45.24
  Bottom 0.305: v102.08,54.61 50.01,54.61 48.58,53.18 v31.75,53.18 | v30.32,48.58 29.53,47.78 23.5,47.78 22.86,48.42 11.43,48.42 10.79,47.78 8.1,47.78 SV_RAM_1.25 7.62,48.1 6.67,47.15 4.92,47.15 v3.02,45.24 | IC5.14 28.26,16.19 10.79,16.19 7.78,19.21 3.81,19.21 v2.22,20.8
BUS_MEMORY_BUS_4  (via drill 0.35)
  Top 0.305: v101.28,28.26 101.28,59.05 101.6,59.37 D13.A | v102.71,25.56 103.82,24.45 v103.82,16.51 | SV_RAM_1.27 6.19,50.8 6.19,50.32 5.24,49.37 3.81,49.37 3.81,44.29 2.7,43.18 v2.7,24.45 | v24.29,23.97 26.83,21.43 26.83,17.94 27.94,16.83 IC5.15
  Bottom 0.305: v101.28,28.26 101.6,27.94 102.23,27.94 102.71,27.46 v102.71,25.56 | v103.82,16.51 99.38,12.06 49.21,12.06 46.67,9.53 30.16,9.53 29.69,10 29.69,12.7 29.21,12.7 IC5.15 | v2.7,24.45 3.17,23.97 9.37,23.97 9.53,23.81 12.06,23.81 12.22,23.97 v24.29,23.97
BUS_MEMORY_BUS_5  (via drill 0.35)
  Top 0.305: v90.49,42.7 90.49,50.8 99.06,59.37 D14.A | v82.07,42.23 79.69,39.85 79.69,30.32 v78.26,28.89 | v24.29,22.86 24.29,17.94 25.4,16.83 IC5.16 | SV_RAM_1.29 8.73,52.23 8.73,42.7 7.78,41.75 6.51,41.75 6.51,40.16 7.46,39.21 8.26,39.21 8.26,39.05 11.11,36.2 11.11,36.04 12.54,34.61 v12.54,23.18
  Bottom 0.305: v90.49,42.7 90.01,42.23 v82.07,42.23 | v78.26,28.89 78.11,28.73 64.61,28.73 63.02,27.15 39.37,27.15 35.72,23.5 24.92,23.5 v24.29,22.86 24.29,23.02 12.7,23.02 v12.54,23.18
BUS_MEMORY_BUS_6  (via drill 0.35)
  Top 0.305: v95.09,62.07 95.09,60.96 D15.A | v54.45,69.69 53.18,70.96 v53.18,75.56 | v9.68,73.34 9.68,57.94 SV_RAM_1.31 | v13.02,15.4 10.64,17.78 v10.64,26.19
  Bottom 0.305: v95.09,62.07 87.47,69.69 v54.45,69.69 | v53.18,75.56 51.75,76.99 13.34,76.99 v9.68,73.34 | IC5.17 21.11,15.72 13.34,15.72 v13.02,15.4 | v10.64,26.19 10,26.83 4.6,26.83 1.43,30 1.43,54.77 6.51,54.77 SV_RAM_1.31
BUS_MEMORY_BUS_7  (via drill 0.35)
  Top 0.305: 91.04,56.44 89.69,55.09 v89.69,40.64 | 91.04,56.44 93.98,59.37 D16.A | v45.56,40.96 45.4,40.8 45.4,31.27 45.09,30.96 45.09,28.42 44.61,27.94 v44.61,20.95 | v20.64,18.1 20.32,17.78 IC5.18 | v6.19,64.61 v6.19,59.85 | v6.19,72.07 6.51,72.07 11.43,76.99 86.52,76.99 86.52,70.64 90.81,66.36 v92.87,66.36 | v97.31,61.91 97.31,59.05 94.61,56.36 91.12,56.36 91.04,56.44
  Bottom 0.305: v89.69,40.64 88.42,39.37 53.66,39.37 52.07,40.96 v45.56,40.96 | v44.61,20.95 41.75,18.1 v20.64,18.1 | v6.19,59.85 SV_RAM_1.33 | v6.19,72.07 v6.19,64.61 | v97.31,61.91 v92.87,66.36
BUS_RESET  (via drill 0.35)
  Top 0.305: v111.92,8.1 110.49,8.1 D41.2
  Bottom 0.305: v111.92,8.1 112.39,8.57 126.52,8.57 135.25,17.3 135.25,52.07 132.08,52.07 SV_RAM_2.30
CTRL_MANUAL_WRITE  (via drill 0.35)
  Top 0.305: v109.38,8.1 107.95,8.1 D43.2 | v134.46,50.01 134.46,52.23 SV_RAM_2.29
  Bottom 0.305: v109.38,8.1 110.33,9.05 126.21,9.05 134.46,17.3 134.46,41.75 | v134.46,50.01 134.46,41.75 | IC3.4 43.81,42.55 80.64,42.55 81.76,41.43 130.02,41.43 130.33,41.75 134.46,41.75
CTRL_MANUAL_WRITE_ENABLE  (via drill 0.35)
  Top 0.305: IC4.13 16.99,76.04 25.4,76.04 | IC4.9 25.4,76.04 | v41.12,38.73 40.96,38.89 40.96,43.02 42.55,44.61 45.56,44.61 v45.56,46.51 | 25.4,76.04 33.81,76.04 34.13,76.36 50.96,76.36 50.96,69.22 v51.28,68.9 | v49.69,68.42 49.69,60.96 50.32,60.33 51.59,60.33 v51.59,48.9
  Bottom 0.305: IC3.13 36.2,38.73 v41.12,38.73 | v45.56,46.51 47.94,48.9 v51.59,48.9 126.21,48.9 127,49.69 132.24,49.69 SV_RAM_2.27 | v51.28,68.9 50.8,68.42 v49.69,68.42
GND  (via drill 0.35)
  Top 0.305: SV_RAM_1.1 14.13,11.27 14.13,5.4 18.1,1.43 37.94,1.43 37.94,6.19 IC5.10 | SV_RAM_3.36 90.01,8.1 88.58,9.53 88.58,12.86 83.98,17.46 83.98,17.62 U$1.GND | C13.2 46.83,24.29 46.83,22.23 v46.35,21.75 46.51,21.75 46.51,12.86 48.1,11.27 48.1,6.19 SV_RAM_3.1 | C7.2 40.16,74.45 39.21,75.41 34.77,75.41 34.77,73.18 31.27,69.69 C4.2 | v29.69,56.04 30.64,55.09 C1.2 | v29.69,60.17 29.37,60.48 29.37,67.79 29.21,67.94 | v8.26,69.37 8.26,69.22 5.56,66.52 C8.2 | 29.53,68.26 v28.73,69.06 | v40.16,36.99 40.32,36.99 | v56.67,50.8 56.99,51.12 56.99,65.08 | SV_RAM_2.1 133.51,18.26 135.25,20 135.25,64.61 134.89,65.04 | SV_RAM_4.1 47.31,70.8 47.31,68.58 47.78,68.1 48.9,68.1 48.9,68.74 49.37,69.22 50.48,69.22 50.48,65.56 R40.1 | 70.01,65.08 70.01,24.45
  Top 0.508: C12.2 123.19,20.64 U$2.GND | C13.2 70.01,24.45 77.15,24.45 U$1.GND | C5.2 40.96,9.21 IC5.10 | C6.2 40.96,23.18 IC6.10 | C3.2 40.32,36.99 40.32,47.94 IC3.7 | C2.2 30.8,40.33 IC2.7 | C1.2 30.8,54.93 IC1.7 | C7.2 40.32,73.98 IC7.7 | C4.2 30.8,69.53 29.53,68.26 29.21,67.94 IC4.7
  Top 1.016: R43.1 R41.1 R42.1 131.4,7.26 131.83,7.26 133.03,8.46 C11.2 133.35,13.02 SV_RAM_2.1 | C10.2 91.76,7.3 91.44,7.62 SV_RAM_3.36 | C8.2 5.08,65.72 SV_RAM_1.36 | C9.2 90.49,73.34 SV_RAM_4.36
  Top 1.27: R40.1 R39.1 R38.1 56.99,65.08 R37.1 R36.1 R35.1 R34.1 R33.1 70.01,65.08 R32.1 R31.1 R30.1 R29.1 R28.1 R27.1 R26.1 R25.1 R16.1 R15.1 R14.1 R13.1 R12.1 R11.1 R10.1 R9.1 111.76,69.85 114.61,72.7 | 114.61,72.7 R8.1 R7.1 R6.1 R5.1 R4.1 R3.1 R2.1 R1.1 133.81,72.24 134.43,72.24 134.89,71.78 134.89,65.04 SV_RAM_2.36 | C9.2 113.98,73.34 114.61,72.7
  Bottom 0.305: SV_RAM_3.1 46.51,5.56 38.89,5.56 IC5.10 | IC6.10 39.53,21.75 v46.35,21.75 | IC7.7 SV_RAM_4.1 | v29.69,60.17 v29.69,56.04 | v8.26,69.37 8.57,69.06 v28.73,69.06 | U$2.GND 124.3,18.89 132.24,18.89 SV_RAM_2.1 | IC2.7 28.42,36.99 v40.16,36.99 | v56.67,50.8 IC3.7
  pour Top: -5.08,73.66 2.54,81.28 133.35,81.28 135.89,81.28 143.51,73.66 143.51,7.62 133.35,-2.54 3.81,-2.54 -5.08,6.35
N$1  (via drill 0.35)
  Top 0.305: v17.78,10.32 IC5.2 v21.91,2.22 | v18.26,12.06 18.89,12.7 18.89,19.21 IC6.2 | U$1.I/O7 74.14,33.5 v74.14,35.24 | v101.12,6.67 101.44,6.99 101.44,11.91 106.36,16.83 v106.36,25.56 | v109.06,28.26 113.03,32.23 U$2.I/O7
  Bottom 0.305: v17.78,10.32 17.78,12.06 v18.26,12.06 | v74.14,35.24 74.45,34.92 111.12,34.92 U$2.I/O7 | v21.91,2.22 22.7,1.43 95.89,1.43 v101.12,6.67 | v109.06,28.26 v106.36,25.56
N$2  (via drill 0.35)
  Top 0.305: v20.32,10.32 IC5.3 v24.45,2.22 | v20.32,11.91 21.43,13.02 21.43,19.21 IC6.3 | U$1.I/O6 76.36,33.18 v76.36,35.72 | v108.74,15.08 108.9,15.24 v108.9,25.56 | v111.6,28.26 115.57,32.23 U$2.I/O6
  Bottom 0.305: v20.32,11.91 v20.32,10.32 | v76.36,35.72 76.68,35.4 113.19,35.4 U$2.I/O6 | v24.45,2.22 24.61,2.06 95.41,2.06 108.43,15.08 v108.74,15.08 | v111.6,28.26 v108.9,25.56
N$3  (via drill 0.35)
  Top 0.305: v22.86,10.32 IC5.4 24.61,4.6 v24.61,3.17 | v22.86,11.91 23.97,13.02 23.97,17.46 22.86,18.57 IC6.4 | U$1.I/O5 78.9,33.18 v78.9,36.2 | v122.71,27.15 118.11,31.75 U$2.I/O5
  Bottom 0.305: v22.86,11.91 v22.86,10.32 | v78.9,36.2 79.22,35.88 115.25,35.88 U$2.I/O5 | v24.61,3.17 25.24,2.54 95.09,2.54 108.43,15.88 121.44,15.88 122.24,16.67 122.24,26.99 122.56,26.99 v122.71,27.15
N$4  (via drill 0.35)
  Top 0.305: v25.4,10.32 IC5.5 25.56,6.19 v25.56,3.33 | v25.4,11.91 26.51,13.02 26.51,17.46 25.4,18.57 IC6.5 | U$1.I/O4 82.07,33.81 v82.07,36.67 | v40.48,3.33 101.92,3.33 101.92,10.32 105.89,14.29 111.44,14.29 v111.44,22.07
  Bottom 0.305: v25.4,11.91 v25.4,10.32 | v82.07,36.67 82.39,36.35 117.32,36.35 119.3,34.37 | U$2.I/O4 119.3,34.37 | v40.48,3.33 v25.56,3.33 | v111.44,22.07 117.95,28.57 120.65,28.57 124.14,32.07 124.14,34.45 119.38,34.45 119.3,34.37
N$5  (via drill 0.35)
  Top 0.305: v27.94,10.32 IC5.6 | v27.94,11.91 29.05,13.02 29.05,15.72 | 29.05,15.72 29.05,19.21 IC6.6 | U$1.I/O3 86.2,30.64 v86.2,29.37 | v29.84,15.72 29.05,15.72 | v89.38,13.02 91.12,14.76 v91.12,29.05
  Bottom 0.305: v27.94,11.91 v27.94,10.32 | v86.2,29.37 86.52,29.05 v91.12,29.05 119.22,29.05 U$2.I/O3 | v29.84,15.72 33.34,15.72 34.45,14.61 34.45,12.22 36.2,12.22 36.67,12.7 37.31,12.7 37.78,12.22 47.15,12.22 47.94,13.02 v89.38,13.02
N$6  (via drill 0.35)
  Top 0.305: v30.48,10.32 IC5.7 | v30.48,11.91 31.59,13.02 31.59,17.46 30.48,18.57 IC6.7 | U$1.I/O2 80.49,18.57 v80.49,20 77.95,22.54 77.95,22.86 74.93,22.86 74.45,22.38 v74.14,22.38
  Bottom 0.305: v30.48,11.91 v30.48,10.32 | v80.49,20 80.64,19.84 118.59,19.84 U$2.I/O2 | IC6.7 33.18,23.02 51.75,23.02 52.7,22.07 73.82,22.07 v74.14,22.38
N$7  (via drill 0.35)
  Top 0.305: v75.25,21.27 U$1.I/O1 | v33.02,10.32 IC5.8 | v33.02,11.91 34.13,13.02 34.13,19.21 IC6.8
  Bottom 0.305: IC6.8 35.24,22.54 46.67,22.54 47.62,21.59 74.93,21.59 v75.25,21.27 80.33,21.27 80.96,20.64 121.6,20.64 121.6,16.83 121.13,16.35 119.54,16.35 U$2.I/O1 | v33.02,11.91 v33.02,10.32
N$8  (via drill 0.35)
  Top 0.305: v35.56,10.32 IC5.9 | v36.99,11.91 36.67,12.22 36.67,18.1 | 36.67,18.1 36.67,19.21 IC6.9 | v82.71,11.27 U$1.I/O0 76.2,18.26 v74.45,20 | 36.67,18.1 43.5,18.1 v43.5,17.62
  Bottom 0.305: v35.56,10.32 36.99,11.75 v36.99,11.91 | v82.71,11.27 83.03,11.59 103.35,11.59 108.11,16.35 114.14,16.35 U$2.I/O0 | v43.5,17.62 45.88,20 v74.45,20
N$9  (via drill 0.35)
  Top 0.305: IC3.8 33.02,53.34 v33.02,61.75 | v18.73,63.02 17.78,63.98 IC4.3
  Bottom 0.305: v33.02,61.75 31.75,63.02 v18.73,63.02
N$10  (via drill 0.35)
  Top 0.305: IC3.9 32.54,51.28 32.54,60.96 v31.75,61.75 | v28.57,62.23 25.4,65.41 IC4.6
  Bottom 0.305: v31.75,61.75 31.27,62.23 v28.57,62.23
N$11
  Top 0.305: R1.2 D1.C
N$12
  Top 0.305: R2.2 D2.C
N$13  (via drill 0.35)
  Top 0.305: IC6.1 14.61,19.68 14.61,15.88 13.34,14.61 11.75,14.61 v11.75,14.76 | v2.38,15.72 1.43,16.67 1.43,52.07 3.17,53.82 v3.17,60.64 | v19.37,62.23 19.53,62.39 19.53,65.88 IC4.4
  Bottom 0.305: v11.75,14.76 10.79,15.72 v2.38,15.72 | v3.17,60.64 4.76,62.23 v19.37,62.23
N$14  (via drill 0.35)
  Top 0.305: IC6.19 17.78,35.4 18.89,36.51 v18.89,40.64
  Bottom 0.305: v18.89,40.64 33.02,40.64 IC3.11
N$15  (via drill 0.35)
  Top 0.305: IC2.12 19.05,46.35 19.05,55.88 v19.21,56.04
  Bottom 0.305: IC1.10 v19.21,56.04
N$16  (via drill 0.35)
  Top 0.305: IC2.1 12.7,43.02 11.59,44.13 v11.59,50.64
  Bottom 0.305: v11.59,50.64 11.91,50.32 18.57,50.32 IC1.4
N$17  (via drill 0.35)
  Top 0.305: U$2.!CE 105.41,27.94 v105.41,27.15 | v102.39,24.29 98.74,20.64 v98.74,10.79 | v13.81,4.6 3.65,14.76 3.65,32.07 3.49,32.23 3.49,43.18 4.92,44.61 6.35,44.61 v6.35,48.9 | v9.53,49.69 11.59,51.75 11.59,53.02 12.38,53.82 15.24,53.82 IC1.2
  Bottom 0.305: v105.41,27.15 102.55,24.29 v102.39,24.29 | v98.74,10.79 91.92,3.97 40.96,3.97 40.32,4.6 v13.81,4.6 | v6.35,48.9 7.14,49.69 v9.53,49.69
N$18  (via drill 0.35)
  Top 0.305: v11.91,39.37 10.79,40.48 v10.79,49.53
  Bottom 0.305: IC2.2 13.34,39.37 v11.91,39.37 | v10.79,49.53 11.11,49.85 20.16,49.85 21.75,51.44 21.75,53.82 23.65,53.82 IC1.6
N$20  (via drill 0.35)
  Top 0.305: v53.34,38.1 U$1.!WE | v17.94,40.16 17.78,40.01 IC2.3
  Bottom 0.305: v53.34,38.1 51.91,39.53 34.13,39.53 33.5,40.16 19.53,40.16 19.21,39.85 18.26,39.85 v17.94,40.16
N$21  (via drill 0.35)
  Top 0.305: U$2.!WE 91.44,34.29 v91.44,42.86 | v45.56,43.5 43.81,41.75 41.43,41.75 41.43,40.32 42.55,39.21 44.93,39.21 44.93,34.77 v40.01,29.84 | v36.51,29.84 30.64,35.72 25.4,35.72 IC2.6
  Bottom 0.305: v91.44,42.86 90.81,43.5 v45.56,43.5 | v40.01,29.84 39.69,30.16 36.83,30.16 v36.51,29.84
N$22  (via drill 0.35)
  Top 0.305: v22.86,41.43 IC2.5 | v22.86,43.02 21.75,44.13 21.75,48.9 24.29,51.44 v24.29,56.04
  Bottom 0.305: v22.86,43.02 v22.86,41.43 | IC1.8 v24.29,56.04
N$23
  Top 0.305: R3.2 D3.C
N$24  (via drill 0.35)
  Top 0.305: v27.94,50.16 IC2.8 | v23.34,56.04 22.86,55.56 IC1.5
  Bottom 0.305: v27.94,50.16 27.78,50.32 24.61,50.32 IC1.5 | IC1.9 23.34,57.63 v23.34,56.04
N$25  (via drill 0.35)
  Top 0.305: IC4.2 17.3,64.61 17.3,62.71 IC1.11 | v46.2,36.83 46.35,36.99 46.35,56.67 46.04,56.99 46.04,61.59 v46.35,61.91
  Bottom 0.305: IC3.1 44.13,36.51 45.88,36.51 v46.2,36.83 | v46.35,61.91 45.88,62.39 33.5,62.39 31.43,64.45 17.46,64.45 IC4.2
N$26  (via drill 0.35)
  Top 0.305: U$2.!OE 102.08,36.35 v102.08,42.23
  Bottom 0.305: v102.08,42.23 99.22,45.09 45.88,45.09 43.81,47.15 30.64,47.15 30.48,47.31 23.34,47.31 22.86,46.83 22.07,46.83 IC2.11
N$27
  Top 0.305: R4.2 D4.C
N$28  (via drill 0.35)
  Top 0.305: U$1.!OE 63.66,35.4 v63.66,38.1
  Bottom 0.305: v63.66,38.1 62.87,38.89 53.34,38.89 52.07,40.16 43.66,40.16 IC3.3
N$29  (via drill 0.35)
  Top 0.305: v37.94,45.56 v37.94,54.77
  Bottom 0.305: IC1.12 19.05,58.42 19.05,56.83 18.89,56.83 18.41,56.36 18.41,54.77 v37.94,54.77 | v37.94,45.56 43.02,45.56 IC3.5
N$30
  Top 0.305: R5.2 D5.C
N$31
  Top 0.305: R6.2 D6.C
N$32
  Top 0.305: R7.2 D7.C
N$33
  Top 0.305: R8.2 D8.C
N$34
  Top 0.305: R9.2 D9.C
N$35
  Top 0.305: R10.2 D10.C
N$36
  Top 0.305: R11.2 D11.C
N$37
  Top 0.305: R12.2 D12.C
N$38
  Top 0.305: R13.2 D13.C
N$39
  Top 0.305: R14.2 D14.C
N$40
  Top 0.305: R15.2 D15.C
N$41
  Top 0.305: R16.2 D16.C
N$42
  Top 0.305: IC3.12 38.73,43.81 38.73,56.52 IC7.3
N$43  (via drill 0.35)
  Top 0.305: v35.72,73.03 37.31,71.44 37.31,60.17 IC7.13
  Bottom 0.305: IC4.8 29.21,73.03 v35.72,73.03
N$44  (via drill 0.35)
  Top 0.305: IC2.9 27.15,46.83 v27.15,49.37 | v45.72,74.3 45.56,74.14 45.56,50.64 IC3.6
  Bottom 0.305: v27.15,49.37 41.75,49.37 42.86,48.26 IC3.6 | IC4.11 22.07,76.04 43.97,76.04 v45.72,74.3
N$45  (via drill 0.35)
  Top 0.305: v55.4,6.51 56.04,7.14 56.04,16.03 57.15,17.14 v57.15,23.65 | v70.8,27.94 72.07,29.21 v72.07,61.75
  Bottom 0.305: IC5.19 14.13,10.32 7.46,10.32 6.99,9.84 6.99,7.46 14.29,7.46 14.92,8.1 43.5,8.1 45.56,6.03 46.35,6.03 46.83,6.51 v55.4,6.51 | v57.15,23.65 59.53,26.04 63.34,26.04 63.66,25.72 65.72,25.72 67.94,27.94 v70.8,27.94 | v72.07,61.75 69.85,63.98 44.77,63.98 44.13,64.61 40.96,64.61 39.85,63.5 IC7.11
N$46  (via drill 0.35)
  Top 0.305: IC4.1 14.45,68.42 26.67,68.42 v26.67,65.88 | v40.16,64.93 41.43,66.2 41.43,66.83 IC7.6
  Bottom 0.305: v26.67,65.88 27.62,64.93 33.18,64.93 33.34,65.09 34.45,65.09 34.61,64.93 v40.16,64.93
N$47
  Top 0.305: IC4.10 24.61,72.55 33.34,72.55 33.34,74.77 34.45,75.88 44.93,75.88 44.93,65.25 IC7.4
N$48
  Bottom 0.305: IC7.5 37.62,66.04 36.2,67.47 29.21,67.47 28.1,68.58 7.94,68.58 7.46,69.06 7.46,72.55 16.03,72.55 IC4.12
N$50
  Top 0.305: R25.2 D25.C
N$51
  Top 0.305: R26.2 D26.C
N$52
  Top 0.305: R27.2 D27.C
N$53
  Top 0.305: R28.2 D28.C
N$54
  Top 0.305: R29.2 D29.C
N$55
  Top 0.305: R30.2 D30.C
N$56
  Top 0.305: R31.2 D31.C
N$57
  Top 0.305: R32.2 D32.C
N$58
  Top 0.305: R33.2 D33.C
N$59
  Top 0.305: R34.2 D34.C
N$60
  Top 0.305: R35.2 D35.C
N$61
  Top 0.305: R36.2 D36.C
N$62
  Top 0.305: R37.2 D37.C
N$63
  Top 0.305: R38.2 D38.C
N$64
  Top 0.305: R39.2 D39.C
N$65
  Top 0.305: R40.2 D40.C
N$66  (via drill 0.35)
  Top 0.305: v112.08,11.43 110.49,9.84 D41.1 | v125.41,11.43 R41.2
  Bottom 0.305: v125.41,11.43 v112.08,11.43
N$67  (via drill 0.35)
  Top 0.305: v113.82,12.22 113.82,10.64 113.03,9.84 D42.1 | v127.16,12.22 R42.2
  Bottom 0.305: v127.16,12.22 v113.82,12.22
N$68  (via drill 0.35)
  Top 0.305: v108.9,10.79 107.95,9.84 D43.1 | v123.67,10.64 R43.2
  Bottom 0.305: v108.9,10.79 109.06,10.64 v123.67,10.64
N$69
  Top 0.305: D44.2 105.41,9.68 104.46,8.73 104.46,7.46 106.2,5.71 124.3,5.71 124.3,7.46 R44.2
N$70  (via drill 0.35)
  Top 0.305: v104.3,9.84 102.87,9.84 D45.2 | v119.38,9.84 R45.2
  Bottom 0.305: v119.38,9.84 v104.3,9.84
VCC  (via drill 0.35)
  Top 0.305: 122.08,6.67 122.08,10.16 124.94,13.02 130.33,13.02 130.81,13.02 | SV_RAM_2.35 131.92,59.53 127.48,59.53 127.48,26.83 127.16,26.51 C12.1 127.16,26.19 128.11,25.24 128.11,20.8 130.65,18.26 SV_RAM_2.2 | C10.1 94.93,5.71 96.68,7.46 96.68,26.19 96.84,26.35 | IC7.9 IC7.10 33.81,64.29 33.81,62.55 | 38.42,73.03 v39.37,73.03 | 33.81,62.55 33.81,57.94 35.56,56.2 IC7.14 | 33.81,62.55 31.43,62.55 30.96,62.07 30.96,56.99 C1.1 | 15.4,71.6 11.59,67.79 11.59,60.8 IC1.14 | 39.21,25.08 39.21,31.59 38.58,32.23 C3.1 | IC3.14 35.4,35.72 32.23,35.72 32.23,41.12 31.27,42.07 C2.1 | IC5.1 16.99,8.1 16.99,11.91 17.14,12.06 | SV_RAM_1.2 5.71,17.14 v5.71,13.97 | 45.32,9.29 43.02,11.59 42.07,11.59 42.07,11.27 C5.1 | 45.32,9.29 SV_RAM_3.2 | 45.4,16.99 45.4,9.37 45.32,9.29 | 45.4,16.99 45.4,24.77 46.83,26.19 C13.1 | 45.4,16.99 43.34,19.05 43.34,23.65 42.07,24.92 C6.1 | 16.35,56.83 16.35,48.74 IC2.14
  Top 0.508: C12.1 96.84,26.35 U$2.VCC | C13.1 50.8,30.16 U$1.VCC | C5.1 18.1,11.11 17.14,12.06 IC5.20 | C6.1 39.21,25.08 18.1,25.08 IC6.20 | C3.1 38.42,32.7 IC3.14 | C2.1 15.56,42.23 IC2.14 | C1.1 16.35,56.83 15.56,56.83 IC1.14 | C7.1 38.42,73.03 38.42,58.74 IC7.14 | C4.1 15.56,71.44 15.4,71.6 IC4.14
  Top 1.016: R45.1 122.08,6.67 R44.1 | C11.1 130.81,13.02 SV_RAM_2.2 | C10.1 90.49,5.4 SV_RAM_3.35 | C8.1 7.3,61.28 SV_RAM_1.35 | C9.1 90.49,71.44 SV_RAM_4.35
  Bottom 0.305: SV_RAM_2.35 126.52,67.79 93.5,67.79 SV_RAM_4.35 88.74,72.55 88.74,74.77 48.1,74.77 SV_RAM_4.2 46.35,73.03 v39.37,73.03 | SV_RAM_1.35 8.89,59.69 IC1.14 | IC5.20 v5.71,13.97
  pour Bottom: -5.08,74.93 2.54,82.55 135.89,82.55 144.78,73.66 144.78,7.62 133.35,-3.81 3.81,-3.81 -6.35,6.35 -6.35,73.66

## Text on the board
tPlace: Main Bus | R1-8 | - | Memory Bus | Address Bus | + | R9-16 | R25-40 | - | - | + | + | Random Access Memory | V. 1.3 | by Dargonrol | write | load | MW | reset | clk